# Altium PCB PCB_23GXSTM32F103Ext1.8EXP_2026-02-23.pcbdoc (part 1 of 2)
Units mil, origin at the board's own origin, x right, y up, seen from the top; angles counter-clockwise.
Board outline 5147 x 5265.55 mil, 2 copper layers (Top Layer, Bottom Layer); 49 components, 79 nets, 352 pads, 63 vias.
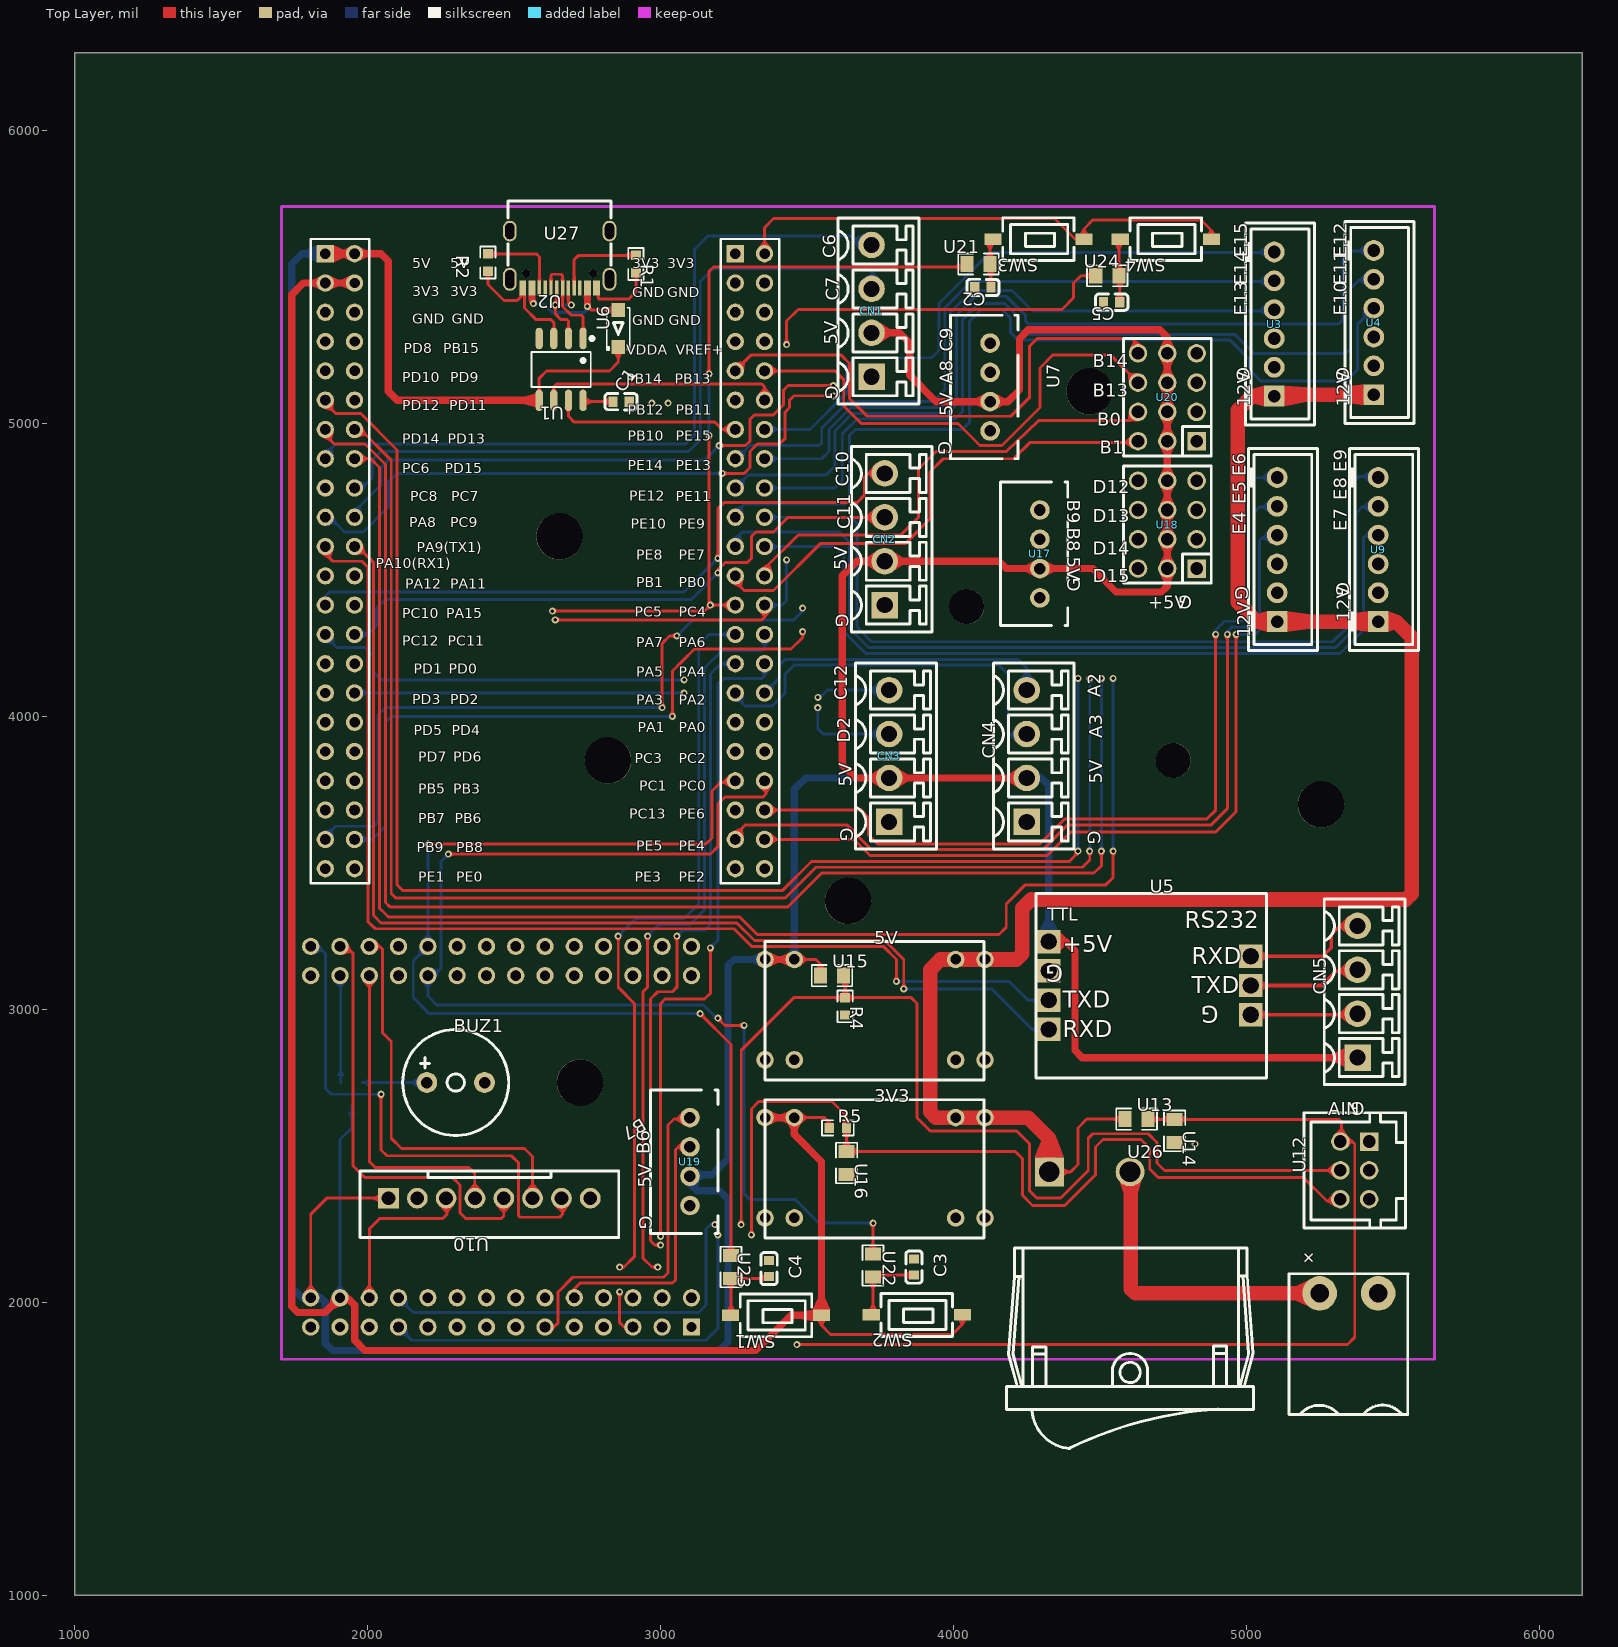
[diagram p0: Top Layer view]
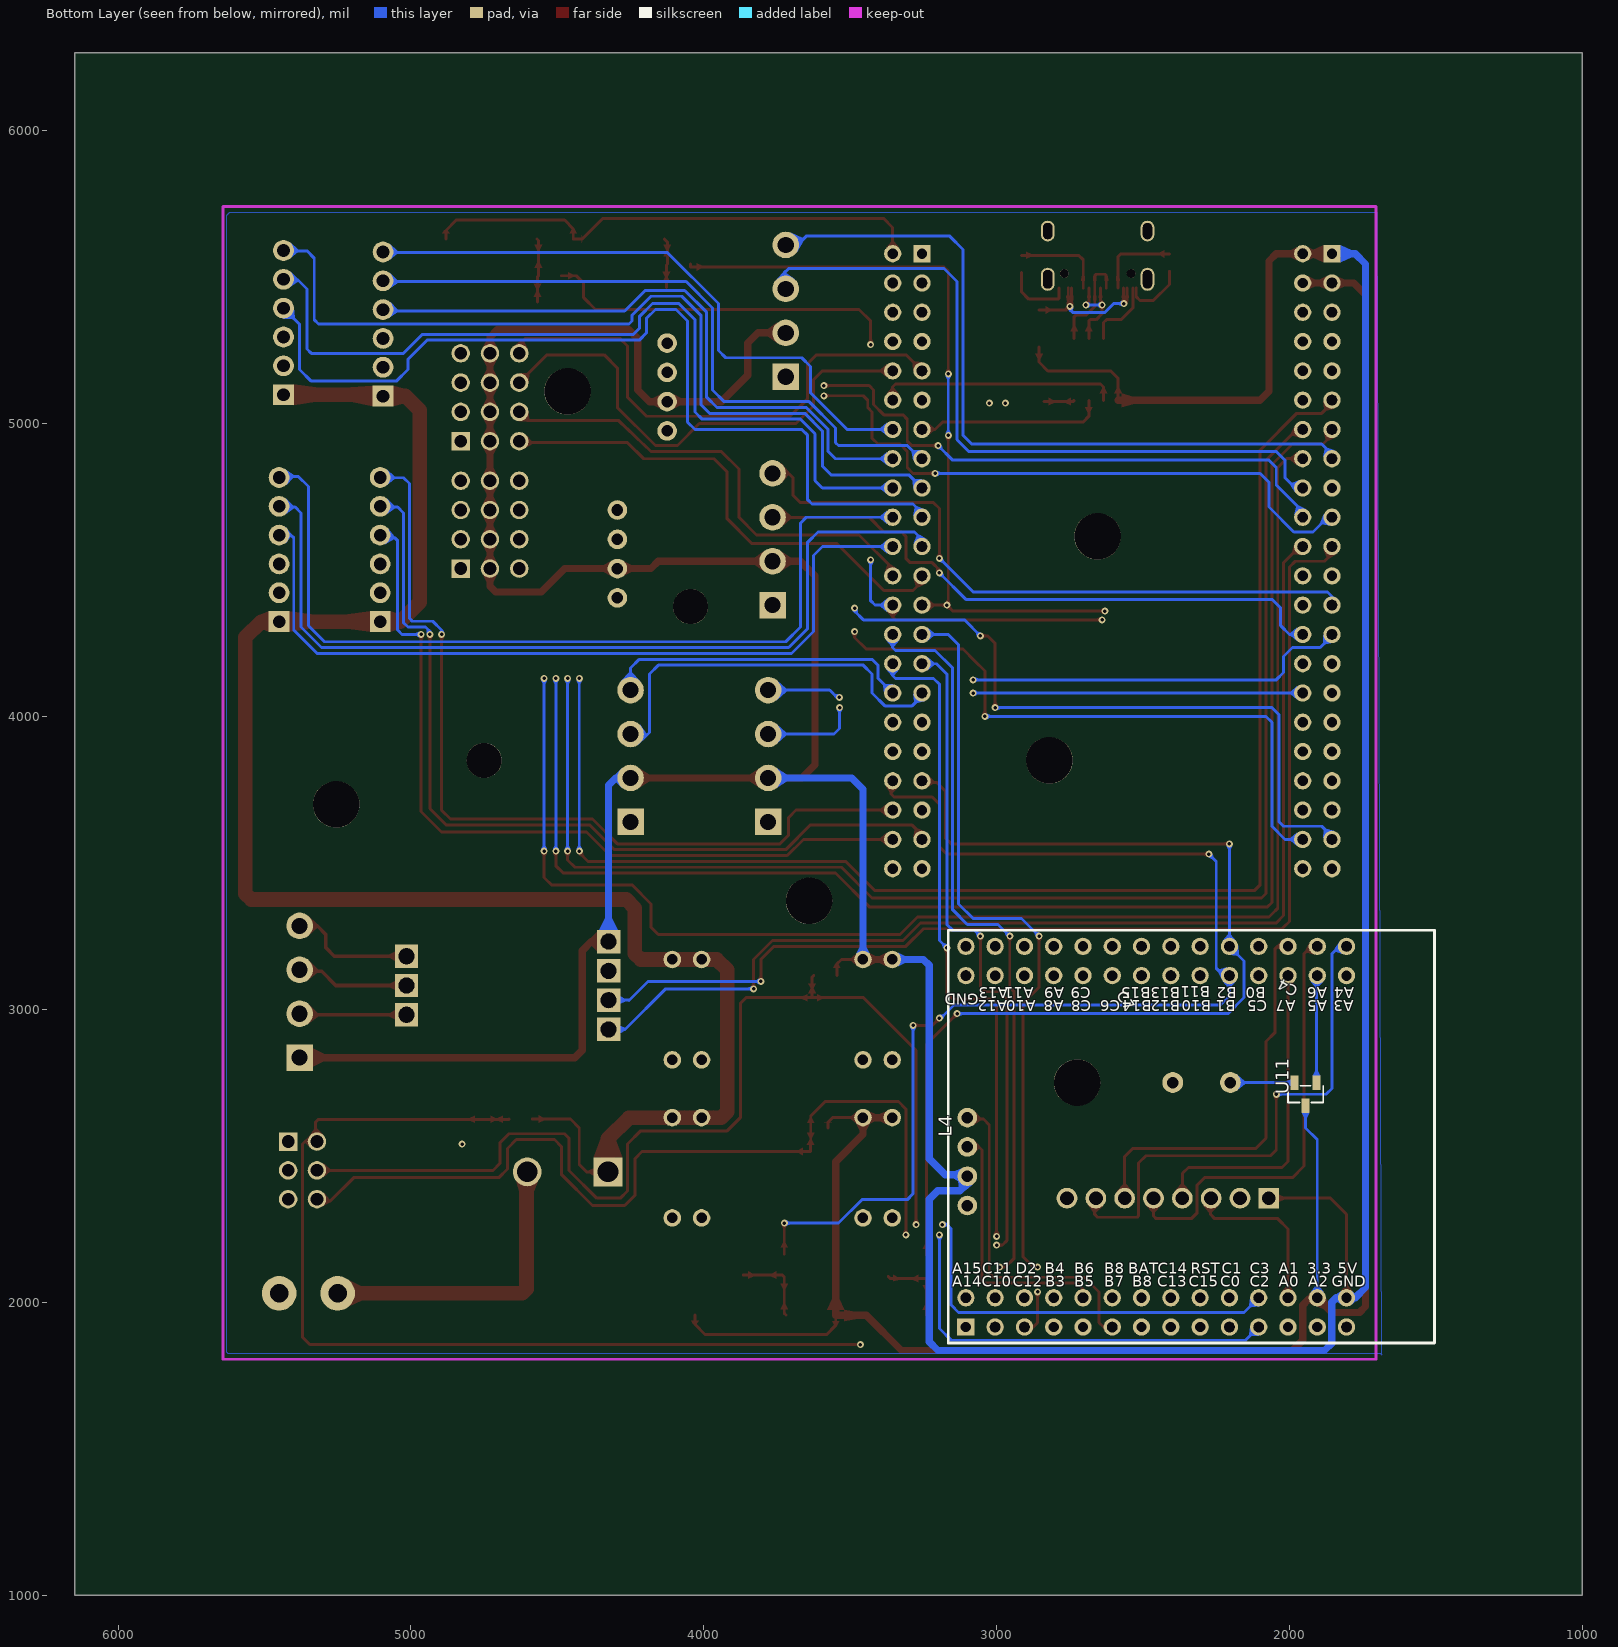
[diagram p1: Bottom Layer view, seen from below]

## Layer stack, top to bottom
Top Layer: signal copper (thickness not stored)
Dielectric: dielectric 12.6, FR-4, Dk 4.8
Bottom Layer: signal copper (thickness not stored)

## Board outline
6147,1000 1000,1000 1000,6265.55 6147,6265.55

## Components (designator, comment, footprint, x,y, rotation, side; value= is the part's Value field where it differs from the comment)
3V3 "降压24到5V最大5AFIX" 降压24到5V最大5AFIX 3750,2455 r0 top
5V "降压24到5V最大5AFIX" 降压24到5V最大5AFIX 3750,2995 r0 top
12V "CONN-TH_6P-P2.50_B6B-XH-A-LF-SN" CONN-TH_6P-P2.50_B6B-XH-A-LF-SN 5105,4570 r90 top
+ "CONN-TH_WJ2EDGR-5.08-2P" CONN-TH_WJ2EDGR-5.08-2P 5350,2030 r0 top
BUZ1 "BUZ-TH_BD9.0-P5.00-D0.6-FD" BUZ-TH_BD9.0-P5.00-D0.6-FD 2300,2750 r0 top
C1 "C0603" C0603 2865,5075 r0 top
C2 "C0603" C0603 4100,5465 r180 top
C3 "C0603" C0603 3865,2120 r90 top
C4 "C0603" C0603 3370,2115 r90 top
C5 "C0603" C0603 4540,5415 r180 top
CN1 "CONN-TH_4P-P3.81_WJ2EDGVC-3.81-4P" CONN-TH_4P-P3.81_WJ2EDGVC-3.81-4P 3720,5385 r90 top
CN2 "CONN-TH_4P-P3.81_WJ2EDGVC-3.81-4P" CONN-TH_4P-P3.81_WJ2EDGVC-3.81-4P 3765,4605 r90 top
CN3 "CONN-TH_4P-P3.81_WJ2EDGVC-3.81-4P" CONN-TH_4P-P3.81_WJ2EDGVC-3.81-4P 3780,3865 r90 top
CN4 "CONN-TH_4P-P3.81_WJ2EDGVC-3.81-4P" CONN-TH_4P-P3.81_WJ2EDGVC-3.81-4P 4250,3865 r90 top
CN5 "CONN-TH_4P-P3.81_WJ2EDGVC-3.81-4P" CONN-TH_4P-P3.81_WJ2EDGVC-3.81-4P 5380,3060 r90 top
L4 "STM32L431RCT6XPB" STM32L431RCT6XPB 1805,3215 r270 bottom
R1 "R0603" R0603 2915,5545 r270 top
R2 "R0603" R0603 2410,5550 r270 top
R4 "R0603" R0603 3630,3010 r270 top
R5 "R0603" R0603 3605,2595 r0 top
SW1 "SW-SMD_L6.1-W3.6-LS7.9" SW-SMD_L6.1-W3.6-LS7.9 3393.72,1954.78 r180 top
SW2 "SW-SMD_L6.1-W3.6-LS7.9" SW-SMD_L6.1-W3.6-LS7.9 3874.81,1956.24 r180 top
SW3 "SW-SMD_L6.1-W3.6-LS7.9" SW-SMD_L6.1-W3.6-LS7.9 4290,5630 r180 top
SW4 "SW-SMD_L6.1-W3.6-LS7.9" SW-SMD_L6.1-W3.6-LS7.9 4725,5630 r180 top
U1 "SOP-8_L4.9-W3.9-P1.27-LS6.0-BL" SOP-8_L4.9-W3.9-P1.27-LS6.0-BL 2660,5185 r180 top
U2 "USB-C_SMD-TYPE-C-31-M-12" USB-C_SMD-TYPE-C-31-M-12 2655,5560 r180 top
U3 "CONN-TH_6P-P2.50_B6B-XH-A-LF-SN" CONN-TH_6P-P2.50_B6B-XH-A-LF-SN 5095,5340 r90 top
U4 "CONN-TH_6P-P2.50_B6B-XH-A-LF-SN" CONN-TH_6P-P2.50_B6B-XH-A-LF-SN 5435,5345 r90 top
U5 "TTL2RS232" TTL2RS232 4680,3080 r0 top
U6 "SOD-123FL_L2.8-W1.8-LS3.7-RD" SOD-123FL_L2.8-W1.8-LS3.7-RD 2855,5325 r90 top
U7 "CONN-TH_B4B-XH-A-LF-SN" CONN-TH_B4B-XH-A-LF-SN 4125,5125 r90 top
U9 "CONN-TH_6P-P2.50_B6B-XH-A-LF-SN" CONN-TH_6P-P2.50_B6B-XH-A-LF-SN 5450,4570 r90 top
U10 "CONN-TH_B8B-XH-A-LF-SN" CONN-TH_B8B-XH-A-LF-SN 2415,2355 r180 top
U11 "SOT-23-3_L2.9-W1.3-P1.90-LS2.4-BR" SOT-23-3_L2.9-W1.3-P1.90-LS2.4-BR 1945,2710 r270 bottom
U12 "CONN-TH_6P-P2.50_HCTL_HC-XHD-2X3A" CONN-TH_6P-P2.50_HCTL_HC-XHD-2X3A 5370,2450 r90 top
U13 "R0805" R0805 4625,2625 r0 top
U14 "R0805" R0805 4755,2585 r270 top
U15 "R0805" R0805 3585,3115 r0 top
U16 "R0805" R0805 3635,2475 r270 top
U17 "CONN-TH_B4B-XH-A-LF-SN" CONN-TH_B4B-XH-A-LF-SN 4295,4555 r90 top
U18 "HDR-TH_12P-P2.54-V-M-R3-C4-S2.54" HDR-TH_12P-P2.54-V-M-R3-C4-S2.54 4730,4655 r90 top
U19 "CONN-TH_B4B-XH-A-LF-SN" CONN-TH_B4B-XH-A-LF-SN 3100,2480 r90 top
U20 "HDR-TH_12P-P2.54-V-M-R3-C4-S2.54" HDR-TH_12P-P2.54-V-M-R3-C4-S2.54 4730,5090 r90 top
U21 "R0805" R0805 4085,5545 r0 top
U22 "R0805" R0805 3725,2125 r270 top
U23 "R0805" R0805 3240,2120 r270 top
U24 "R0805" R0805 4525,5505 r0 top
U26 "SW-TH_SS11-BBIWJ-R20-R" SW-TH_SS11-BBIWJ-R20-R 4465,2445 r0 top
U27 "STM32F407VGT SZYX" "STM32F407VGT SZYX" 2590,4570 r0 top

## Footprints (in the part's own frame and the unit in brackets; to place one, negate y for a bottom-side part, rotate by r counter-clockwise, add the part's x,y. Pads: shape width x height; smd on the part's side, far side on the other; paste and mask are expansions set on the pad)
BUZ-TH_BD9.0-P5.00-D0.6-FD [mm]
  round 1.8 hole 1 paste+0 mask+0.051: 1(-2.5,0) 2(2.5,0)
  silkscreen extent -4.6,-4.6 4.6,4.6
C0603 [mm]
  rect 0.8x0.9 smd paste+0 mask+0.051: 1(-0.7,0) 2(0.7,0)
  silkscreen extent -1.41,-0.71 1.39,0.72
CONN-TH_4P-P3.81_WJ2EDGVC-3.81-4P [mm]
  rect 2.3x2.3 hole 1.4 paste+0 mask+0.051: 1(-5.715,0)
  round 2.3 hole 1.4 paste+0 mask+0.051: 2(-1.905,0) 3(1.905,0) 4(5.715,0)
  silkscreen extent -8.06,-4.1 8.06,2.9
CONN-TH_6P-P2.50_B6B-XH-A-LF-SN [mm]
  rect 1.8x1.8 hole 1.1 paste+0 mask+0.051: 1(-6.251,0.001)
  round 1.8 hole 1.1 paste+0 mask+0.051: 2(-3.749,-0.001) 3(-1.249,-0.001) 4(1.251,-0.001) 5(3.751,-0.001) 6(6.251,-0.001)
  silkscreen extent -8.75,-3.5 8.75,2.5
CONN-TH_6P-P2.50_HCTL_HC-XHD-2X3A [mm]
  rect 1.6x1.6 hole 1.1 paste+0 mask+0.05: 1(2.5,-1.25)
  round 1.6 hole 1.1 paste+0 mask+0.05: 2(2.5,1.25) 3(0,-1.25) 4(0,1.25) 5(-2.5,-1.25) 6(-2.5,1.25)
  silkscreen extent -5,-4.4 5,4.4
CONN-TH_B4B-XH-A-LF-SN [mm]
  round 1.7 hole 1 paste+0 mask+0.051: 1(-3.81,0) 2(-1.27,0) 3(1.27,0) 4(3.81,0)
  silkscreen extent -6.22,-2.41 6.22,3.43
CONN-TH_B8B-XH-A-LF-SN [mm]
  rect 1.8x1.8 hole 1.2 paste+0 mask+0.051: 1(8.75,0)
  round 1.8 hole 1.2 paste+0 mask+0.051: 2(6.25,0) 3(3.75,0) 4(1.25,0) 5(-1.25,0) 6(-3.75,0) 7(-6.25,0) 8(-8.75,0)
  silkscreen extent -11.22,-2.35 11.22,3.4
CONN-TH_WJ2EDGR-5.08-2P [mm]
  round 3 hole 1.6 paste+0 mask+0.051: 1(-2.54,0) 2(2.54,0)
  silkscreen extent -5.21,-10.5 5.12,1.7
HDR-TH_12P-P2.54-V-M-R3-C4-S2.54 [mm]
  rect 1.6x1.6 hole 1.1 paste+0 mask+0.05: 1(-3.81,-2.54)
  round 1.6 hole 1.1 paste+0 mask+0.05: 2(-3.81,0) 3(-3.81,2.54) 4(-1.27,-2.54) 5(-1.27,0) 6(-1.27,2.54) 7(1.27,-2.54) 8(1.27,0) 9(1.27,2.54) 10(3.81,-2.54) 11(3.81,0) 12(3.81,2.54)
  silkscreen extent -5.08,-3.81 5.08,3.81
R0603 [mil]
  rect 31.75x34.02 smd paste-3937.01 mask+2: 1(-29.65,0) 2(29.65,0)
  silkscreen extent -55,-26 55,26
R0805 [mil]
  rect 44.59x54.21 smd paste-3937.01 mask+2: 1(-39.37,0) 2(39.37,0)
  silkscreen extent -69,-36 69,36
SOD-123FL_L2.8-W1.8-LS3.7-RD [mm]
  rect 1.2x1.2 smd paste+0 mask+0.051: 1(-1.6,0) 2(1.6,0)
  silkscreen extent -1.9,-1 1.8,1
SOP-8_L4.9-W3.9-P1.27-LS6.0-BL [mm]
  oval 0.63x1.865 smd paste+0 mask+0.051: 1(-1.905,-2.682) 2(-0.635,-2.682) 3(0.635,-2.682) 4(1.905,-2.682) 5(1.905,2.682) 6(0.635,2.682) 7(-0.635,2.682) 8(-1.905,2.682)
  silkscreen extent -2.82,-2.83 2.58,1.52
SOT-23-3_L2.9-W1.3-P1.90-LS2.4-BR [mm]
  rect 1.25x0.7 smd paste+0 mask+0.051: 1(-1,0.95) 2(-1,-0.95) 3(1,0)
  silkscreen extent -0.73,-1.53 0.73,1.53
"STM32F407VGT SZYX" [mm]
  rect 1.5x1.5 hole 0.9 paste+0 mask+0.051: 1(-18.674,25.659) 1(16.886,25.659)
  round 1.5 hole 0.9 slot 0.905 at 90 deg paste+0 mask+0.051: 2(-16.134,25.659) 3(-18.674,23.119) 3(16.886,23.119) 4(19.426,23.119) 5(-18.674,20.579) 5(16.886,20.579) 6(-16.134,20.579) 6(19.426,20.579) 9(16.886,15.499) 10(19.426,15.499) 11(-18.674,12.959) 12(19.426,12.959) 13(-18.674,10.419) 13(16.886,10.419) 14(-16.134,10.419) 14(19.426,10.419) 15(-18.674,7.879) 15(16.886,7.879) 16(-16.134,7.879) 16(19.426,7.879) 17(16.886,5.339) 18(-16.134,5.339) 18(19.426,5.339) 19(-18.674,2.799) 19(16.886,2.799) 20(-16.134,2.799) 20(19.426,2.799) 21(-18.674,0.259) 21(16.886,0.259) 22(-16.134,0.259) 22(19.426,0.259) 23(16.886,-2.281) 24(19.426,-2.281) 25(-18.674,-4.821) 25(16.886,-4.821) 26(19.426,-4.821) 27(-18.674,-7.361) 27(16.886,-7.361) 28(-16.134,-7.361) 28(19.426,-7.361) 29(16.886,-9.901) 30(19.426,-9.901) 31(16.886,-12.441) 32(-16.134,-12.441) 32(19.426,-12.441) 37(16.886,-20.061) 38(19.426,-20.061) 39(-18.674,-22.601) 40(-16.134,-22.601) 40(19.426,-22.601) 41(-18.674,-25.141) 41(16.886,-25.141) 42(-16.134,-25.141) 42(19.426,-25.141)
  round 1.5 hole 0.9 paste+0 mask+0.051: 2(19.426,25.659) 4(-16.134,23.119) 7(-18.674,18.039) 7(16.886,18.039) 8(-16.134,18.039) 8(19.426,18.039) 9(-18.674,15.499) 10(-16.134,15.499) 11(16.886,12.959) 12(-16.134,12.959) 17(-18.674,5.339) 23(-18.674,-2.281) 24(-16.134,-2.281) 26(-16.134,-4.821) 29(-18.674,-9.901) 30(-16.134,-9.901) 31(-18.674,-12.441) 33(-18.674,-14.981) 33(16.886,-14.981) 34(-16.134,-14.981) 34(19.426,-14.981) 35(-18.674,-17.521) 35(16.886,-17.521) 36(-16.134,-17.521) 36(19.426,-17.521) 37(-18.674,-20.061) 38(-16.134,-20.061) 39(16.886,-22.601) 43(-18.674,-27.681) 43(16.886,-27.681) 44(-16.134,-27.681) 44(19.426,-27.681)
  silkscreen extent -19.94,-28.95 20.7,26.93
STM32L431RCT6XPB [mm]
  rect 1.5x1.5 hole 0.9 paste+0 mask+0.051: 1(33.02,-33.02)
  round 1.5 hole 0.9 slot 0.905 at 90 deg paste+0 mask+0.051: 2(30.48,-33.02) 3(33.02,-30.48) 4(30.48,-30.48) 5(33.02,-27.94) 10(30.48,-22.86) 11(33.02,-20.32) 19(33.02,-10.16) 21(33.02,-7.62) 22(30.48,-7.62) 24(30.48,-5.08) 27(33.02,0) 30(0,0) 31(2.54,-2.54) 32(0,-2.54) 33(2.54,-5.08) 35(2.54,-7.62) 36(0,-7.62) 37(2.54,-10.16) 38(0,-10.16) 39(2.54,-12.7) 41(2.54,-15.24) 43(2.54,-17.78) 44(0,-17.78) 55(2.54,-33.02) 56(0,-33.02)
  round 1.5 hole 0.9 paste+0 mask+0.051: 6(30.48,-27.94) 7(33.02,-25.4) 8(30.48,-25.4) 9(33.02,-22.86) 12(30.48,-20.32) 13(33.02,-17.78) 14(30.48,-17.78) 15(33.02,-15.24) 16(30.48,-15.24) 17(33.02,-12.7) 18(30.48,-12.7) 20(30.48,-10.16) 23(33.02,-5.08) 25(33.02,-2.54) 26(30.48,-2.54) 28(30.48,0) 29(2.54,0) 34(0,-5.08) 40(0,-12.7) 42(0,-15.24) 45(2.54,-20.32) 46(0,-20.32) 47(2.54,-22.86) 48(0,-22.86) 49(2.54,-25.4) 50(0,-25.4) 51(2.54,-27.94) 52(0,-27.94) 53(2.54,-30.48) 54(0,-30.48)
  silkscreen extent -1.4,-34.54 34.42,7.62
SW-SMD_L6.1-W3.6-LS7.9 [mm]
  rect 1.5x1 smd paste+0 mask+0.051: 1(-3.95,0) 2(3.95,0)
  silkscreen extent -3.1,-1.85 3.1,1.85
SW-TH_SS11-BBIWJ-R20-R [mm]
  rect 2.5x2.5 hole 1.8 paste+0 mask+0.051: 1(-3.5,0)
  round 2.5 hole 1.8 paste+0 mask+0.051: 2(3.5,0)
  silkscreen extent -7.2,-24 14.2,-6.6
TTL2RS232 [mil]
  rect 80x80 hole 54 slot 54.2 at 0 deg paste+0 mask+2: 1(-355,151.26) 2(-355,51.26) 3(-355,-48.74) 4(-355,-148.74) 5(335,101.26) 6(335,1.26) 7(335,-98.74)
  silkscreen extent -399,-315 389,315
USB-C_SMD-TYPE-C-31-M-12 [mm]
  oval 1.2x2 hole 0.8 slot 1.6 at 90 deg paste+0 mask+0.051: 0(-4.325,1.706) 1(4.325,1.706)
  oval 1.2x1.8 hole 0.8 slot 1.4 at 90 deg paste+0 mask+0.051: 2(4.325,-2.474) 3(-4.325,-2.474)
  rect 0.3x1.3 smd paste-100 mask+0.051: A1(-3.35,2.474) A4(-2.55,2.474) A5(-1.25,2.474) A6(-0.25,2.474) A7(0.25,2.474) A8(1.25,2.474) A9(2.55,2.474) A12(3.35,2.474) B1(3.05,2.474) B4(2.25,2.474) B5(1.75,2.474) B6(0.75,2.474) B7(-0.75,2.474) B8(-1.75,2.474) B9(-2.25,2.474) B12(-3.05,2.474)
  round 0.75 hole 0.75 unplated paste+0: ""(-2.9,1.206) ""(2.9,1.206)
  silkscreen extent -4.47,-5.09 4.47,0.49
降压24到5V最大5AFIX [mil]
  round 60 hole 36 paste+0 mask+2: 1(-393.71,175.2) 1(-293.71,175.2) 2(-393.71,-167.32) 2(-293.71,-167.32) 3(257.47,175.2) 3(357.47,175.19) 4(257.47,-167.32) 4(357.47,-167.33)
  silkscreen extent -394,-236 354,236

## Free pads (board coordinates)
  round 158.74 hole 158.74 unplated paste+0: ""(2655,4615) ""(2725,2750) ""(2820,3850) ""(3640,3370) ""(4465,5110) ""(5255,3700)
  round 119.37 hole 119.37 unplated paste+0: ""(4045,4375) ""(4750,3850)

## Via types
v1: diameter 24, hole 12, Top Layer to Bottom Layer, tented both sides, 63 vias

## Nets (pads, with @x,y where several pads share a name; then routed paths per layer and width w, separated by ;. In a path a pad name is that pad's centre, name@x,y a point inside that pad or via, vN(x,y) a via of type N, cw(c..) or ccw(c..) an arc to the next point about the centre after c; other vN are vias at no path point)
3V3: 3V3.1 L4.26 R5.1 SW1.1 SW2.1 U11.3 U27.3@1854.79,5480.21 U27.4@1954.79,5480.21 | length 7923.5
  Top Layer w10: 3V3.1@3456.29,2630.2 3559.8,2630.2 3575.3,2614.7 R5.1@3575.34,2595 ; SW1.1@3549.23,1954.78 3549.2,1920.8 3580,1890 3995.6,1890 4030.3,1924.7 SW2.1@4030.32,1956.24
  Top Layer w25: U27.4@1954.79,5480.21 U27.3@1854.79,5480.21 1780,5480 1740,5440 1740,1985 1760,1965 1855,1965 L4.26@1905,2015 1910,2010 1935,2010 1955,1990 1955,1870 1990,1835 3325,1835 3444.8,1954.8 SW1.1@3549.23,1954.78 3549.2,2479.2 3456.3,2573.7 3V3.1@3456.29,2630.2 3V3.1@3356.29,2630.2
  Bottom Layer w10: L4.26@1905,2015 1905,2555 1945,2595 U11.3@1945,2670.63
3V3VDE1: SW3.1 SW4.1 U27.2@3354.79,5580.21 | length 1748.4
  Top Layer w10: U27.2@3354.79,5580.21 3355,5670 3385,5700 4345,5700 4415,5630 SW3.1@4445.51,5630 4445.5,5664.5 4475,5695 4845,5695 4880.5,5659.5 SW4.1@4880.51,5630
5V: 5V.1 CN1.2 CN2.2 CN3.2 CN4.2 CN5.1 L4.28 U1.5 U5.1 U6.1 U7.2 U10.1 U15.1 U17.2 U18.2 U18.5 U18.8 U18.11 U19.2 U20.2 U20.5 U20.8 U20.11 U27.1@1854.79,5580.21 U27.2@1954.79,5580.21 | length 17008.4
  Top Layer w10: L4.28@1805,2015 1805,2300 1860,2355 U10.1@2070.51,2355 ; U1.5@2585,5079.39 2585,5155 2610,5180 2825,5180 2855,5210 U6.1@2855,5262.01 ; 5V.1@3456.29,3170.2 3529.8,3170.2 3545.6,3154.4 U15.1@3545.63,3115
  Top Layer w25: U27.1@1854.79,5580.21 U27.2@1954.79,5580.21 2045,5580 2070,5555 2070,5110 2100.6,5079.4 U1.5@2585,5079.39 ; 5V.1@3356.29,3170.2 5V.1@3456.29,3170.2 ; CN1.2@3720,5309.99 3815,5310 3850,5275 3850,5165 3940,5075 U7.2@4125,5075 4185,5075 4225,5115 4225,5290 4255,5320 4705,5320 4730,5295 U20.11@4730,5240 U20.8@4730,5140 U20.5@4730,5040 U20.2@4730,4940 U18.11@4730,4805 U18.8@4730,4705 U18.5@4730,4605 U18.2@4730,4505 4730,4445 4710,4425 4555,4425 4475,4505 U17.2@4295,4505 4180,4505 4155,4530 CN2.2@3765,4529.99 3670,4530 3620,4480 3620,3835 3665,3790 CN3.2@3780,3789.99 CN4.2@4250,3789.99 ; U5.1@4325,3231.26 4383.7,3231.3 4415,3200 4415,2860 4440,2835 CN5.1@5380,2835
  Bottom Layer w25: U27.1@1854.79,5580.21 1775.2,5580.2 1740,5545 1740,2050 1775,2015 L4.28@1805,2015 1840,2015 1855,2000 1855,1860 1880,1835 1895,1835 3200,1835 3230,1865 3230,2351 3201,2380 3125,2380 3100,2405 U19.2@3100,2430 3105,2435 3175,2435 3230,2490 3230,2515 3230,3150 3250.2,3170.2 5V.1@3356.29,3170.2 ; 5V.1@3456.29,3170.2 3456.3,3751.3 3495,3790 CN3.2@3780,3789.99 ; CN4.2@4250,3789.99 4300,3790 4325,3765 U5.1@4325,3231.26
12V: 3V3.3 5V.3 12V.1 U3.1 U4.1 U9.1 U13.1 U26.1 | length 5955.7
  Top Layer w10: U26.1@4327.2,2445 4400,2445 4425,2470 4425,2595 4455,2625 U13.1@4585.63,2625
  Top Layer w50: 5V.3@4107.47,3170.19 5V.3@4007.47,3170.2 3955,3170 3920,3135 3920,2650 3939.8,2630.2 3V3.3@4007.47,2630.2 3V3.3@4107.47,2630.19 4255,2630 4327.2,2557.8 U26.1@4327.2,2445 ; 5V.3@4107.47,3170.19 4215.18,3170.18 4235,3190 4235,3345 4265,3375 5545,3375 5565,3395 5565,4270 5511.1,4323.9 U9.1@5449.97,4323.9 12V.1@5104.97,4323.9 5036.1,4323.9 4970,4390 4970,5045 5020,5095 5021.1,5093.9 U3.1@5094.97,5093.9 5100,5098.9 U4.1@5434.97,5098.9
12VI: +.1 U26.2 | length 1052.1
  Top Layer w50: U26.2@4602.8,2445 4605,2442.8 4605,2045 4620,2030 +.1@5250,2030
B0: U20.6 U27.24@3354.79,4480.21 | length 1616.7
  Top Layer w10: U27.24@3354.79,4480.21 3354.8,4504.8 3470,4620 3820,4620 3880,4680 3880,4845 3940,4905 4180,4905 4290,5010 4600,5010 U20.6@4630,5040
B1: U20.3 U27.23@3254.79,4480.21 | length 1712.7
  Top Layer w10: U27.23@3254.79,4480.21 3254.8,4460.2 3285,4430 3385,4430 3545,4590 3835,4590 3920,4675 3920,4835 3965,4880 4205,4880 4260,4935 4625,4935 U20.3@4630,4940
B13: U20.9 U27.10@3354.79,5180.21 | length 1680.5
  Top Layer w10: U27.10@3354.79,5180.21 3594.79,5180.21 3625,5150 3625,5060 3685,5000 4015,5000 4090,4925 4165,4925 4295,5055 4295,5190 4340,5235 4535,5235 U20.9@4630,5140
B14: U20.12 U27.9@3254.79,5180.21 | length 1805.7
  Top Layer w10: U27.9@3254.79,5180.21 3309.58,5235 3615,5235 3645,5205 3645,5085 3705,5025 4195,5025 4260,5090 4260,5265 4285,5290 4610,5290 4630,5270 U20.12@4630,5240
BUZSWT: BUZ1.1 U11.2 | length 219.4
  Bottom Layer w10: U11.2@1982.4,2749.37 2200.9,2749.4 BUZ1.1@2201.56,2750
C0: L4.37 U22.1 U27.38@3354.79,3780.21 | length 4111.2
  Top Layer w10: v1(2275,3530) 3170,3530 3195,3555 3195,3700 3220,3725 3350,3725 3360,3735 3360,3774.68 U27.38@3354.68,3780 ; v1(3195,2970) 3220,2945 v1(3285,2945) ; U22.1@3725,2164.37 v1(3725,2270)
  Bottom Layer w10: v1(2275,3530) 2250,3505 2250,3140 2225,3115 L4.37@2205,3115 2205,3045 2235,3015 3145,3015 3190,2970 v1(3195,2970) ; v1(3285,2945) 3285,2370 3305,2350 3460,2350 3540,2270 v1(3725,2270)
C1: L4.38 U23.1 U27.37@3254.79,3780.21 | length 3650
  Top Layer w10: v1(2205,3565) 3155,3565 3175,3585 3175,3745 3205,3775 3249.68,3775 U27.37@3254.68,3780 ; v1(3135,2985) 3240,2880 U23.1@3240,2159.37
  Bottom Layer w10: v1(2205,3565) L4.38@2205,3215 2155,3165 2155,3040 2210,2985 v1(3135,2985)
C4: L4.35 U24.1 U27.26@3354.79,4380.21 | length 4665.3
  Top Layer w10: v1(2640,4330) 3345,4330 3355,4340 U27.26@3354.7,4380 ; v1(3430,5270) 3430,5350 3470,5390 4370,5390 4410,5430 4410,5480 4435,5505 U24.1@4485.63,5505
  Mid-Layer 2 w10: L4.35@2105,3115 2140,3115 2155,3130 2155,4295 2190,4330 v1(2640,4330) ; v1(3430,4535) v1(3430,5270)
  Bottom Layer w10: U27.26@3354.79,4380.21 3415.21,4380.21 3430,4395 v1(3430,4535)
C5: L4.36 U21.1 U27.25@3254.79,4380.21 | length 4295
  Top Layer w10: v1(2630,4360) 3150,4360 v1(3170,4380) ; v1(3165,4960) 3165,4385 v1(3170,4380) ; v1(3165,5170) 3165,5520 3180,5535 4045.6,5535 U21.1@4045.63,5545 ; U27.25@3254.68,4380 v1(3170,4380)
  Mid-Layer 2 w10: L4.36@2105,3215 2105,4280 2185,4360 v1(2630,4360)
  Bottom Layer w10: v1(3165,4960) v1(3165,5170)
CC1: R1.1 U2.A5 | length 313.6
  Top Layer w10: U2.A5@2704.21,5462.59 2704.2,5559.2 2720.3,5574.7 R1.1@2915,5574.65
CC2: R2.1 U2.B5 | length 286.9
  Top Layer w10: R2.1@2410,5579.65 2575.3,5579.7 2586.1,5568.9 U2.B5@2586.1,5462.59
D12: U18.12 U27.11@1854.79,5080.21 | length 5639.4
  Top Layer w10: U27.11@1854.79,5080.21 1854.79,5070.21 1890,5035 1975,5035 2100,4910 2100,3425 2120,3405 3415,3405 3515,3505 4395,3505 4425,3535 v1(4425,3540)
  Mid-Layer 2 w10: v1(4425,4130) 4425,4755 4475,4805 U18.12@4630,4805
  Bottom Layer w10: v1(4425,3540) v1(4425,4130)
D13: U18.9 U27.14@1954.79,4980.21 | length 5442.1
  Top Layer w10: U27.14@1954.79,4980.21 1974.8,4980.2 2080,4875 2080,3395 2095,3380 3425,3380 3530,3485 4440,3485 4465,3510 v1(4465,3540)
  Mid-Layer 2 w10: v1(4465,4130) 4465,4685 4485,4705 U18.9@4630,4705
  Bottom Layer w10: v1(4465,3540) v1(4465,4130)
D14: U18.6 U27.13@1854.79,4980.21 | length 5502.1
  Top Layer w10: U27.13@1854.79,4980.21 1854.79,4960.21 1885,4930 1990,4930 2060,4860 2060,3365 2075,3350 3435,3350 3550,3465 4480,3465 4505,3490 v1(4505,3540)
  Mid-Layer 2 w10: v1(4505,4130) 4505,4590 4520,4605 U18.6@4630,4605
  Bottom Layer w10: v1(4505,3540) v1(4505,4130)
D15: U18.3 U27.16@1954.79,4880.21 | length 5403.9
  Top Layer w10: U27.16@1954.79,4880.21 2009.79,4880.21 2040,4850 2040,3345 2060,3325 2070,3315 3270,3315 3330,3255 4155,3255 4180,3280 4180,3360 4245,3425 4520,3425 4540.1,3445.1 4545,3450 v1(4545,3540)
  Mid-Layer 2 w10: v1(4545,4130) 4545,4490 4560,4505 U18.3@4630,4505
  Bottom Layer w10: v1(4545,3540) v1(4545,4130)
D+: U1.1 U2.A6 U2.B6 | length 350.1
  Top Layer w10: U2.B6@2625.47,5462.59 2625.5,5505.5 2630,5510 2660,5510 2664.8,5504.8 U2.A6@2664.84,5462.59 2664.8,5400.2 2695,5370 2730,5370 2735,5365 U1.1@2735,5290.61
D-: U1.2 U2.A7 U2.B7 | length 321.5
  Top Layer w10: U2.A7@2645.16,5462.59 2645.2,5410.2 v1(2640,5405) 2640,5375 2660,5355 2680,5355 2685,5350 U1.2@2685,5290.61 ; U2.B7@2684.53,5462.59 2684.5,5415.5 v1(2695,5405)
  Bottom Layer w10: v1(2640,5405) v1(2695,5405)
DRDY: L4.34 U10.6 | length 1357.5
  Top Layer w10: L4.34@2005,3215 2040,3215 2050,3205 2050,2920 2080,2890 2080,2560 2115,2525 2535,2525 2562.64,2497.36 U10.6@2562.64,2355
E4: 12V.4 U27.42@3354.79,3580.21 | length 2759.4
  Top Layer w10: U27.42@3354.79,3580.21 3659.79,3580.21 3715,3525 4320,3525 4400,3605 4810,3605 4895,3605 4965,3675 v1(4965,4280)
  Bottom Layer w10: v1(4965,4280) 5030,4280 5045,4295 5045,4600 5055,4610 5095.77,4610 12V.4@5105.03,4619.26
E5: 12V.5 U27.41@3254.79,3580.21 | length 2974.4
  Top Layer w10: U27.41@3254.79,3580.21 3254.79,3594.79 3290,3630 3635,3630 3720,3545 4305,3545 4390,3630 4770,3630 4880,3630 4935,3685 v1(4935,4280)
  Bottom Layer w10: v1(4935,4280) 4935,4290 4950,4305 5010,4305 5025,4320 5025,4695 5045,4715 5102.35,4715 12V.5@5105.03,4717.68
E6: 12V.6 U27.40@3354.79,3680.21 | length 2981
  Top Layer w10: U27.40@3354.79,3680.21 3684.79,3680.21 3710,3655 3710,3595 3740,3565 4295,3565 4380,3650 4780,3650 4865,3650 4895,3680 v1(4895,4280)
  Bottom Layer w10: v1(4895,4280) 4895,4295 4925,4325 4995,4325 5005,4335 5005,4795 5025,4815 5103.9,4815 12V.6@5105.03,4816.1
E7: U9.4 U27.22@3354.79,4580.21 | length 2751.1
  Bottom Layer w10: U27.22@3354.79,4580.21 3594.8,4580.2 3625,4550 3625,4290 3700,4215 5320,4215 5400,4295 5400,4610 5410,4620 U9.4@5450.03,4619.26
E8: U9.5 U27.21@3254.79,4580.21 | length 2995.1
  Bottom Layer w10: U27.21@3254.79,4580.21 3254.79,4604.79 3280,4630 3610,4630 3645,4595 3645,4300 3710,4235 5305,4235 5375,4305 5375,4695 5395,4715 5447.35,4715 U9.5@5450.03,4717.68
E9: U9.6 U27.20@3354.79,4680.21 | length 2993.2
  Bottom Layer w10: U27.20@3354.79,4680.21 3649.8,4680.2 3670,4660 3670,4305 3720,4255 5295,4255 5350,4310 5350,4785 5385,4820 5446.1,4820 U9.6@5450.03,4816.1
E10: U4.4 U27.19@3254.79,4680.21 | length 3158.9
  Bottom Layer w10: U27.19@3254.7,4680 3254.7,4694.7 3285,4725 3630,4725 3645,4740 3645,4960 3665,4980 4030,4980 4055,5005 4055,5350 4095,5390 4160,5390 4165,5390 4195,5360 4195,5310 4220,5285 4945,5285 5010,5220 5010,5185 5050,5145 5340,5145 5380,5185 5380,5339.23 U4.4@5435.03,5394.26
E11: U4.5 U27.18@3354.79,4780.21 | length 2938.2
  Bottom Layer w10: U27.18@3354.68,4780 3595,4780 3620,4805 3620,4965 3670,5015 4005,5015 4030,5040 4030,5355 4085,5410 4175,5410 4220,5365 4220,5325 4240,5305 4960,5305 5025,5240 5340,5240 5355,5255 5355,5460 5385,5490 5432.35,5490 U4.5@5435.03,5492.68
E12: U4.6 U27.17@3254.79,4780.21 | length 2978.6
  Bottom Layer w10: U27.17@3254.7,4780 3300,4825 3565,4825 3595,4855 3595,4975 3655,5035 3980,5035 4010,5065 4010,5370 4075,5435 4180,5435 4245,5370 4245,5350 4255,5340 5315,5340 5330,5355 5330,5565 5355,5590 5433.92,5590 U4.6@5435.03,5591.1
E13: U3.4 U27.16@3354.79,4880.21 | length 2223.1
  Bottom Layer w10: U27.16@3354.68,4880 3550,4880 3575,4905 3575,4980 3650,5055 3955,5055 3990,5090 3990,5380 4065,5455 4200,5455 4270,5385 5090.77,5385 U3.4@5095.03,5389.26
E14: U3.5 U27.15@3254.79,4880.21 | length 2285.3
  Bottom Layer w10: U27.15@3254.7,4880 3260,4880 3305,4925 3540,4925 3550,4935 3550,4985 3640,5075 3930,5075 3970,5115 3970,5395 4060,5485 5092.3,5485 U3.5@5095.03,5487.68
E15: U3.6 U27.14@3354.79,4980.21 | length 2137.9
  Bottom Layer w10: U27.14@3354.68,4980 3510,4980 3635,5105 3635,5195 3665,5225 3925,5225 3950,5250 3950,5410 4125,5585 5093.92,5585 U3.6@5095.03,5586.1
G: L4.31 U11.1 | length 366.7
  Bottom Layer w10: L4.31@1905,3115 1907.6,3112.4 U11.1@1907.6,2749.37
GMD: C5.2
GND: 3V3.2 3V3.4 5V.2 5V.4 12V.2 +.2 BUZ1.2 C1.2 C2.2 C3.2 C4.2 CN1.1 CN2.1 CN3.1 CN4.1 L4.55 L4.56 R1.2 R2.2 R4.2 U1.3 U2.0 U2.1 U2.2 U2.3 U2.A1 U2.A12 U2.B1 U2.B12 U3.2 U4.2 U5.2 U7.1 U9.2 U10.2 U12.1 U12.3 U12.5 U14.2 U16.2 U17.1 U18.1 U18.4 U18.7 U18.10 U19.1 U20.1 U20.4 U20.7 U20.10 U27.3@3254.79,5480.21 U27.4@3354.79,5480.21 U27.5 U27.6 | length 698.4
  Top Layer w10: R2.2@2410,5520.35 2410,5475 2465,5420 2510,5420 2523.1,5433.1 U2.A12@2523.11,5462.59 ; U2.B1@2534.93,5462.59 2534.9,5395.1 2575,5355 2625,5355 2635,5345 U1.3@2635,5290.61 ; U2.A1@2786.89,5462.6 2786.9,5428.1 2790,5425 2890,5425 2915,5450 R1.2@2915,5515.35
  other v1: 4825,2540 2970,5070 3025,5070
L4MISO1: L4.32 U10.5 | length 1489.4
  Top Layer w10: L4.32@1905,3215 1925,3215 1950,3190 1950,2465 1990,2425 2290,2425 2315,2400 2315,2305 2335,2285 2455,2285 2464.2,2294.2 U10.5@2464.21,2355
L4MOSI1: L4.33 U10.4 | length 1096.6
  Top Layer w10: L4.33@2005,3115 2005,2480 2025,2460 2345,2460 2365,2440 U10.4@2365.79,2355
L4NSS1: L4.30 U10.7 | length 1790.1
  Top Layer w10: v1(2045,2710) 2045,2520 2065,2500 2490,2500 2515,2475 2515,2295 2520,2290 2655,2290 2665,2300 2665,2351.1 U10.7@2661.06,2355
  Bottom Layer w10: L4.30@1805,3215 1830,3215 1855,3190 1855,2730 1875,2710 v1(2045,2710)
L4SCK1: L4.24 U10.3 | length 576.8
  Top Layer w10: L4.24@2005,2015 2005,2250 2040,2285 2255,2285 2270,2300 2270,2352.4 U10.3@2267.36,2355
L4SCL1: L4.10 U19.3 | length 886.6
  Top Layer w10: L4.10@2705,2015 2705,2045 2725,2065 3040,2065 3050,2075 3050,2520 3060,2530 U19.3@3100,2530
L4SDA1: L4.11 U19.4 | length 1148.5
  Top Layer w10: L4.11@2605,1915 2635,1915 2650,1930 2650,2035 2700,2085 3010,2085 3025,2100 3025,2605 3045,2625 3095,2625 U19.4@3100,2630
M3V3: L4.21 R5.2 U12.6 U16.1 | length 4581.7
  Top Layer w10: v1(3310,2230) 3310,2660 3335,2685 3585,2685 3634.7,2635.3 R5.2@3634.66,2595 U16.1@3635,2514.37 4210.6,2514.4 4235,2490 4235,2365 4270,2330 4380,2330 4485,2435 4485,2530 4510,2555 4640,2555 4670,2525 4670,2455 4700,2425 5195,2425 5275,2345 5314.2,2345 U12.6@5320.79,2351.57
  Mid-Layer 2 w10: v1(3195,2230) v1(3310,2230)
  Bottom Layer w10: L4.21@2105,1915 2150,1870 3155,1870 3195,1910 v1(3195,2230)
M5V: L4.22 R4.1 U12.4 U15.2 | length 5114.3
  Top Layer w10: v1(3275,2265) 3275,2860 3454.7,3039.7 R4.1@3630,3039.66 ; U15.2@3624.37,3115 3630,3109.4 R4.1@3630,3039.66 ; U12.4@5320.79,2450 4720,2450 4695,2475 4695,2545 4665,2575 4475,2575 4460,2560 4460,2450 4365,2355 4285,2355 4260,2380 4260,2540 4215,2585 3920,2585 3875,2630 3875,3020 3855.3,3039.7 R4.1@3630,3039.66
  Mid-Layer 2 w10: v1(3185,2265) v1(3275,2265)
  Bottom Layer w10: L4.22@2105,2015 2155,1965 3130,1965 3155,1990 3155,2250 3170,2265 v1(3185,2265)
M12V: L4.19 U12.2 U13.2 U14.1 | length 4658.7
  Top Layer w10: 3480,1855 5310,1855 5345,1855 5370,1880 5370,2540 5360,2550 5322.4,2550 U12.2@5320.79,2548.43 5325,2552.6 5325,2615 5315.6,2624.4 U14.1@4755,2624.37 4665,2624.4 U13.2@4664.37,2625
  Mid-Layer 2 w10: L4.19@2205,1915 2205,1870 2220,1855 v1(3465,1855)
OPG: CN5.2 U5.7 | length 368.7
  Top Layer w12.01: U5.7@5015,2981.26 5380,2981.3 CN5.2@5380,2984.99
OPRX: CN5.4 U5.5 | length 434.3
  Top Layer w12.01: U5.5@5015,3181.26 5261.3,3181.3 5290,3210 5290,3255 5320,3285 CN5.4@5380,3284.99
OPTX: CN5.3 U5.6 | length 387.2
  Top Layer w12.01: U5.6@5015,3081.26 5256.3,3081.3 5305,3130 5375,3130 CN5.3@5380,3135
PC5V: U2.A4 U2.A9 U2.B4 U2.B9 U6.2 | length 561.7
  Top Layer w10: U2.A9@2554.6,5462.59 2554.6,5420.4 v1(2565,5410) 2566.4,5411.4 U2.B4@2566.42,5462.6 ; U2.B9@2743.59,5462.59 2743.6,5406.4 v1(2750,5400) ; U2.A4@2755.39,5462.6 2755.4,5405.4 v1(2750,5400) ; U6.2@2855,5387.99 2762,5388 v1(2750,5400)
  Bottom Layer w10: v1(2565,5410) 2600,5410 2630,5380 2740,5380 2750,5390 v1(2750,5400)
RST: U10.8
RTS: U1.4
RX1: U5.3 U27.21@1854.79,4580.21 | length 3880.2
  Top Layer w10: U27.21@1854.79,4580.21 1854.79,4555.21 1880,4530 1980,4530 2000,4510 2000,3300 2020,3280 2025,3275 3250,3275 3310,3215 3760,3215 3805,3170 v1(3805,3095)
  Bottom Layer w10: v1(3805,3095) 4190,3095 4255,3030 4256.3,3031.3 U5.3@4325,3031.26
RX2: CN4.3 U27.31@3254.79,4080.21 | length 1334.5
  Bottom Layer w10: U27.31@3254.79,4080.21 3254.79,4070.21 3290,4035 3380,4035 3425,4080 3425,4145 3455,4175 4155,4175 4185,4145 4185,3945 4195,3935 4245,3935 CN4.3@4250,3940
RX3: U1.6 U27.12@3354.79,5080.21 | length 818.9
  Top Layer w10: U1.6@2635,5079.39 2635,5125 2645,5135 3345,5135 3355,5125 U27.12@3354.7,5080
RX4: CN2.3 U27.28@1954.79,4280.21 | length 2060.7
  Top Layer w10: v1(3195,4490) 3195,4500 3220,4525 3295,4525 3310,4540 3310,4615 3325,4630 3385,4630 3435,4680 CN2.3@3765,4680
  Bottom Layer w10: U27.28@1954.79,4280.21 2000.21,4280.21 2030,4310 2030,4370 2060,4400 3105,4400 v1(3195,4490)
RX5: CN3.3 U27.32@1954.79,4080.21 | length 1925
  Mid-Layer 2 w10: v1(3080,4080) 3145,4080 3195,4030 v1(3536.3,4030)
  Bottom Layer w10: U27.32@1954.79,4080.21 v1(3080,4080) ; v1(3536.3,4030) 3536.3,3958.7 3555,3940 CN3.3@3780,3940
RX6: CN1.3 U27.18@1954.79,4780.21 | length 2495.5
  Bottom Layer w10: U27.18@1954.79,4780.21 1980.21,4780.21 2015,4815 2015,4875 2045,4905 3095,4905 3135,4945 3135,5485 3180,5530 3710,5530 3725,5515 3725,5465 CN1.3@3720,5460
S$110: 
S$50933: C5.1 SW4.2 U24.2 | length 218.4
  Top Layer w10: C5.1@4567.56,5415 4567.6,5501.8 U24.2@4564.37,5505 4564.4,5624.9 SW4.2@4569.49,5630
S$51055: C4.1 SW1.2 U23.2 | length 259.4
  Top Layer w10: SW1.2@3238.21,1954.78 3240,1956.6 U23.2@3240,2080.63 3363.2,2080.6 C4.1@3370,2087.45
S$51065: C3.1 SW2.2 U22.2 | length 274.6
  Top Layer w10: SW2.2@3719.3,1956.24 3725,1961.9 U22.2@3725,2085.63 3731.8,2092.4 C3.1@3865,2092.45
S$51075: C2.1 SW3.2 U21.2 | length 170.5
  Top Layer w10: C2.1@4127.56,5465 4127.6,5541.8 U21.2@4124.37,5545 4124.4,5619.9 SW3.2@4134.49,5630
SCL1: U17.3 U27.42@1954.79,3580.21 | length 3204
  Top Layer w10: v1(3040,4000) 3040,4155 3075,4190 3115,4230 3445,4230 3485,4270 v1(3485,4290)
  Mid-Layer 2 w10: v1(3485,4290) 3510,4290 3535,4315 3535,4535 3590,4590 3925,4590 3940,4605 U17.3@4295,4605
  Bottom Layer w10: U27.42@1954.79,3580.21 2015.21,3580.21 2060,3625 2060,3980 2080,4000 v1(3040,4000)
SCL3: U7.3 U27.19@1854.79,4680.21 | length 2764.4
  Top Layer w10: v1(3210,4830) 3285,4830 3305,4850 3305,4905 3330,4930 3405,4930 3425,4950 3425,5040 3440,5055 3440,5080 3455,5095 v1(3590,5095)
  Mid-Layer 2 w10: v1(3590,5095) 3605,5095 3620,5110 3620,5200 3650,5230 4055,5230 4110,5175 U7.3@4125,5175
  Bottom Layer w10: U27.19@1854.79,4680.21 1869.79,4680.21 1920,4630 1985,4630 2070,4715 2070,4800 2100,4830 v1(3210,4830)
SDA1: U17.4 U27.41@1854.79,3580.21 | length 3377.4
  Top Layer w10: v1(3005,4030) 3005,4250 3030,4275 v1(3055,4275)
  Mid-Layer 2 w10: v1(3485,4370) 3485,4570 3535,4620 3875,4620 3960,4705 U17.4@4295,4705
  Bottom Layer w10: U27.41@1854.79,3580.21 1854.8,3589.8 1890,3625 2020,3625 2035,3640 2035,4005 2060,4030 v1(3005,4030) ; v1(3055,4275) 3110,4330 3455,4330 3485,4360 v1(3485,4370)
SDA3: U7.4 U27.20@1954.79,4680.21 | length 2586.2
  Top Layer w10: v1(3200,4925) 3290,4925 3305,4940 3305,5015 3320,5030 3385,5030 3420,5065 3420,5115 3435,5130 v1(3590,5130)
  Mid-Layer 2 w10: v1(3590,5130) 3590,5215 3625,5250 3760,5250 3785,5275 U7.4@4125,5275
  Bottom Layer w10: U27.20@1954.79,4680.21 1954.79,4699.79 2045,4790 2045,4850 2070,4875 3150,4875 v1(3200,4925)
TMISO: L4.4 U27.28@3354.79,4280.21 | length 2616.1
  Top Layer w10: v1(2955,3250) 2955,3075 2940,3060 2940,2150 2970,2120 v1(2990,2120)
  Mid-Layer 2 w10: v1(2990,2120) 3005,2105 L4.4@3005,2015
  Bottom Layer w10: v1(2955,3250) 2995,3290 3100,3290 3150,3340 3150,4165 3210,4225 3345,4225 3355,4235 U27.28@3354.7,4280
TMOSI: L4.5 U27.27@3254.79,4280.21 | length 2768.2
  Top Layer w10: v1(2855,3250) 2855,3075 2910,3020 2910,2155 2875,2120 v1(2860,2120) ; v1(2860,2035) 2860,1930 2875,1915 L4.5@2905,1915
  Mid-Layer 2 w10: v1(2860,2035) v1(2860,2120)
  Bottom Layer w10: v1(2855,3250) 2915,3310 3080,3310 3130,3360 3130,4245 3165,4280 U27.27@3254.68,4280
TNSS: L4.2 U27.30@3354.79,4180.21 | length 2560.6
  Top Layer w10: v1(3000,2225) 3000,3020 3015,3035 3150,3035 3170,3055 v1(3170,3210)
  Mid-Layer 2 w10: v1(3000,2225) 3085,2225 3105,2205 L4.2@3105,2015
  Bottom Layer w10: v1(3170,3210) 3195,3235 3195,4110 3215,4130 3345,4130 3355,4140 U27.30@3354.7,4180
TSCK: L4.3 U27.29@3254.79,4180.21 | length 2588
  Top Layer w10: v1(3000,2195) 2980,2195 2965,2210 2965,3035 2990,3060 3040,3060 3055,3075 v1(3055,3250)
  Mid-Layer 2 w10: v1(3000,2195) 3035,2195 3050,2180 3050,1935 3030,1915 L4.3@3005,1915
  Bottom Layer w10: v1(3055,3250) 3075,3270 3150,3270 3170,3290 3170,4145 3205,4180 U27.29@3254.7,4180
TX1: U5.4 U27.22@1954.79,4580.21 | length 3817.6
  Top Layer w10: U27.22@1954.79,4580.21 1964.8,4580.2 2020,4525 2020,3320 2045,3295 3260,3295 3320,3235 3765,3235 3830,3170 v1(3830,3070)
  Bottom Layer w10: v1(3830,3070) 4130,3070 4268.7,2931.3 U5.4@4325,2931.26
TX2: CN4.4 U27.32@3354.79,4080.21 | length 1056.3
  Bottom Layer w10: U27.32@3354.79,4080.21 3405,4130.42 3405,4175 3425,4195 4220,4195 4250,4165 CN4.4@4250,4089.99
TX3: U1.7 U27.13@3254.79,4980.21 | length 642.7
  Top Layer w10: U1.7@2685,5079.39 2685,5025 2705,5005 3185,5005 3210,4980 U27.13@3254.7,4980
TX4: CN2.4 U27.25@1854.79,4380.21 | length 2248.6
  Top Layer w10: v1(3195,4540) 3195,4710 3215,4730 3670,4730 3695,4755 3695,4815 3710,4830 CN2.4@3765,4829.99
  Bottom Layer w10: U27.25@1854.79,4380.21 1854.79,4409.79 1870,4425 3080,4425 v1(3195,4540)
TX5: CN3.4 U27.27@1854.79,4280.21 | length 2059.9
  Mid-Layer 2 w10: v1(3080,4125) 3395,4125 3455,4065 v1(3537.04,4065)
  Bottom Layer w10: U27.27@1854.79,4280.21 1854.79,4275.21 1895,4235 1990,4235 2020,4205 2020,4150 2045,4125 v1(3080,4125) ; v1(3537.04,4065) 3545,4065 3570,4090 CN3.4@3780,4089.99
TX6: CN1.4 U27.15@1854.79,4880.21 | length 2572.9
  Bottom Layer w10: U27.15@1854.79,4880.21 1854.8,4894.8 1890,4930 3085,4930 3115,4960 3115,5595 3160,5640 3650,5640 3680,5610 CN1.4@3720,5609.99
V3: C1.1 U1.8 | length 104.2
  Top Layer w10: U1.8@2735,5079.39 2739.4,5075 C1.1@2837.45,5075
pads on no net: 12V.3 L4.1 L4.6 L4.7 L4.8 L4.9 L4.12 L4.13 L4.14 L4.15 L4.16 L4.17 L4.18 L4.20 L4.23 L4.25 L4.27 L4.29 L4.39 L4.40 L4.41 L4.42 L4.43 L4.44 L4.45 L4.46 L4.47 L4.48 L4.49 L4.50 L4.51 L4.52 L4.53 L4.54 U2. U2.A8 U2.B8 U3.3 U4.3 U9.3 U27.1@3254.79,5580.21 U27.7 U27.8 U27.9@1854.79,5180.21 U27.10@1954.79,5180.21 U27.11@3254.79,5080.21 U27.12@1954.79,5080.21 U27.17@1854.79,4780.21 U27.23@1854.79,4480.21 U27.24@1954.79,4480.21 U27.26@1954.79,4380.21 U27.29@1854.79,4180.21 U27.30@1954.79,4180.21 U27.31@1854.79,4080.21 U27.33 U27.34 U27.35 U27.36 U27.37@1854.79,3780.21 U27.38@1954.79,3780.21 U27.39 U27.40@1954.79,3680.21 U27.43 U27.44

## Polygon pours and split planes (outlines as drawn)
GND on Bottom Layer (solid): 1700,5720 5620,5720 5630,5710 5630,1830 5625,1825 1690,1825 1685,1820
GND on Top Layer (solid): 1690,5725 5610,5725 5630,5705 5630,1820 5615,1805 1750,1805 1710,1845 1690,1865